# Altium PCB high-spped-thermocouple-logger_panel.PcbDoc (part 2 of 2)
Units mm, origin at the board's own origin, x right, y up, seen from the top; angles counter-clockwise.
Board outline 200.2 x 200.2 mm, 4 copper layers (Top Layer, GND Layer, VCC Layer, Bottom Layer), stack 1.55 mm thick; 2 components, 0 nets, 0 pads, 0 vias.
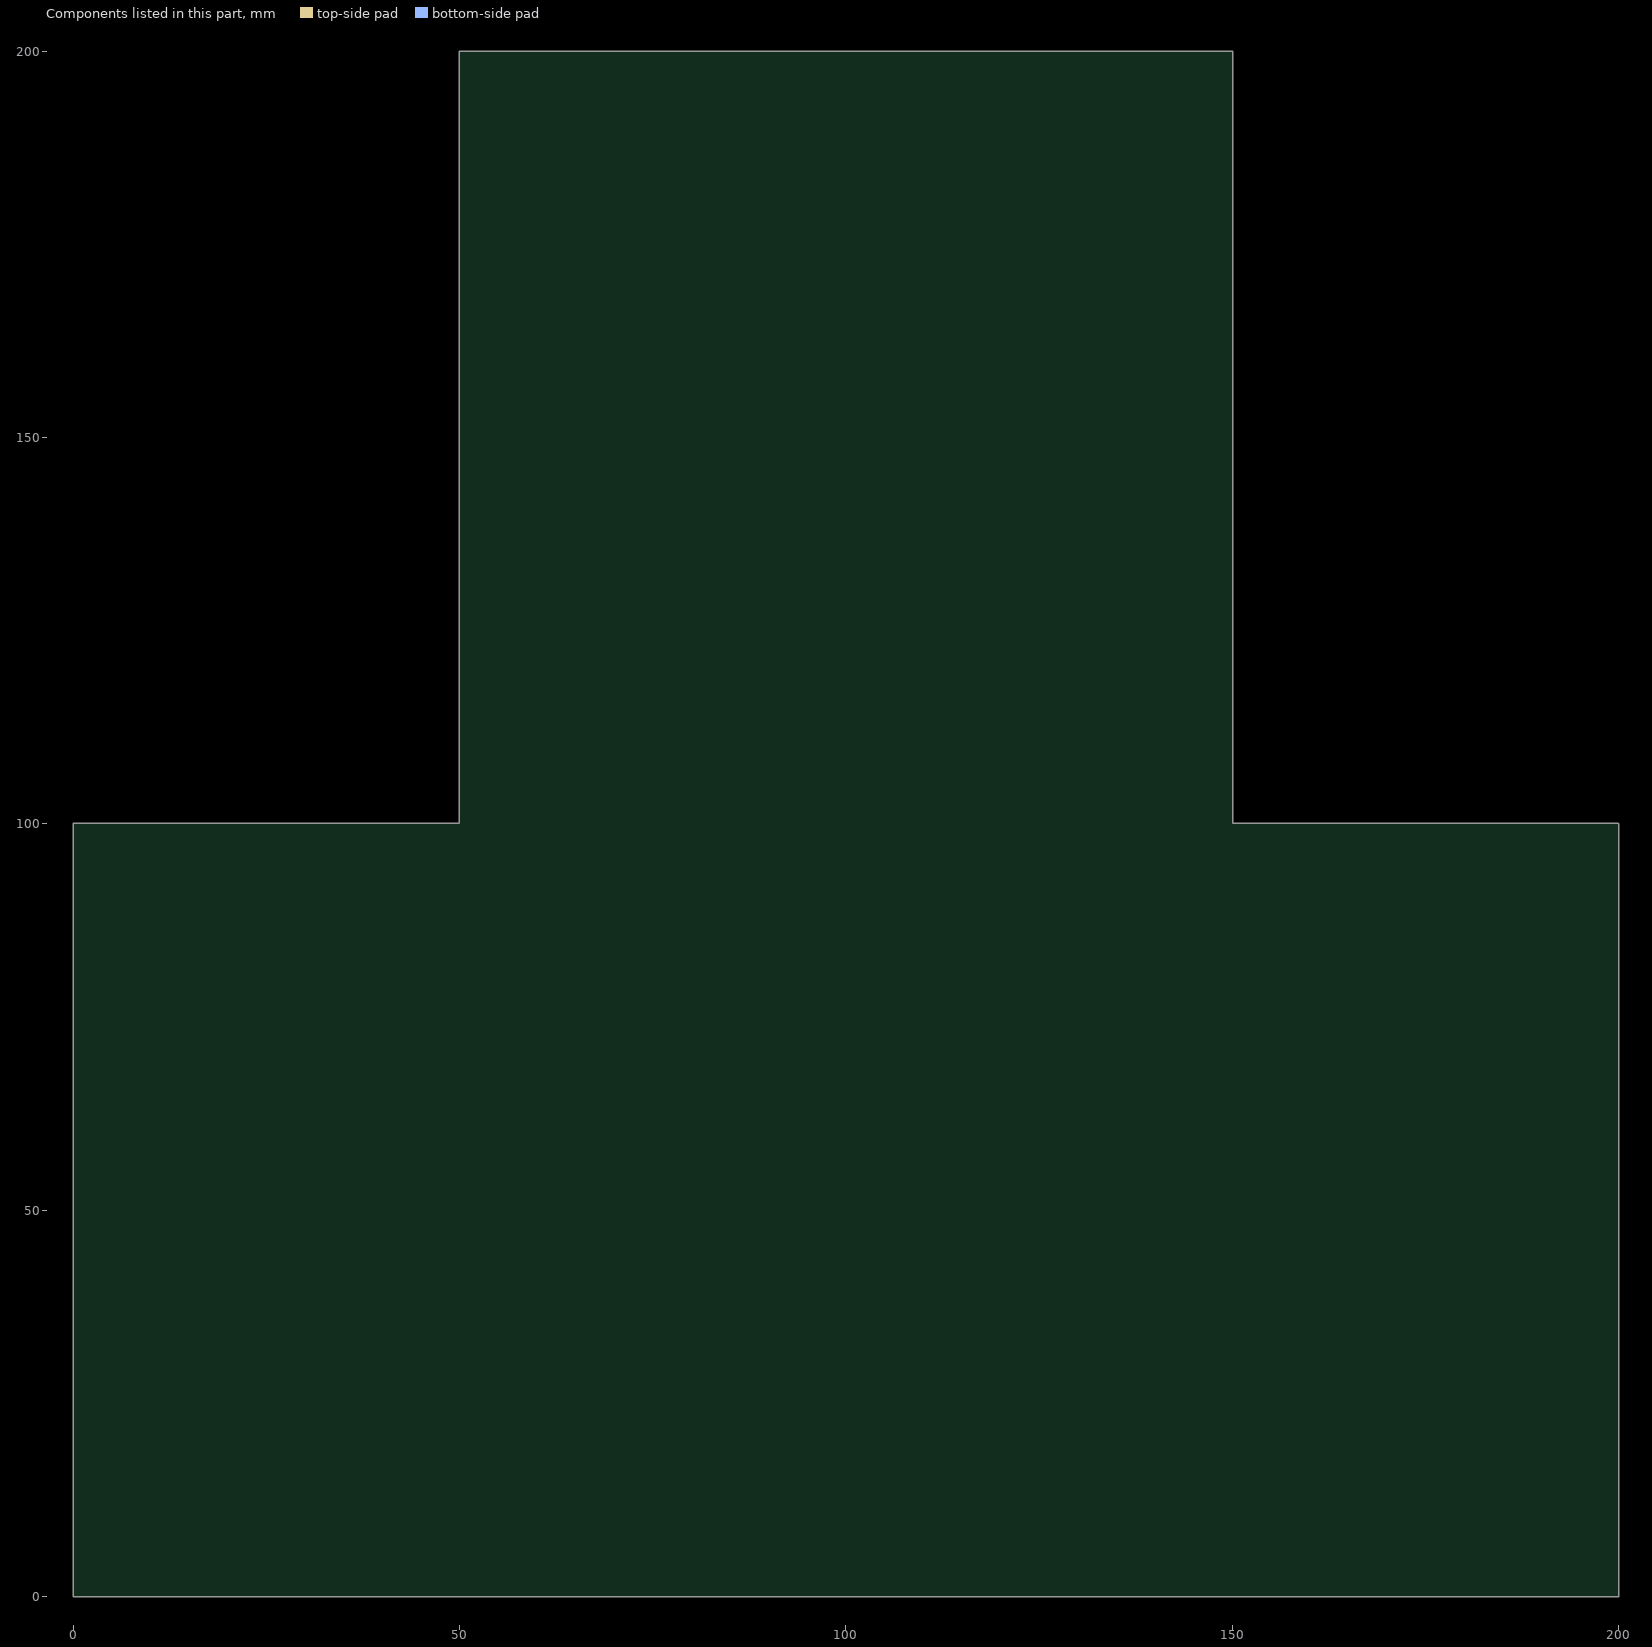
[diagram p4: the components of this part, seen from the top]

## Dimensions
200,100 to 200,0 on Courtyard Bot
150,200 to 150,100 on Courtyard Bot
0,100 to 50,100 on Courtyard Bot
0,-0.1 to 200,-0.1 on Courtyard Bot
0,0 to 50,200 on Courtyard Bot

## Panel: embedded boards
"high-spped-thermocouple-logger.PcbDoc" at 200,0, 1 rows x 1 columns, spacing 63.5 x 38.1, rotation 90

## Text inside footprints (layer, text, board x,y; h text height)
Designator4: PCB Info "*.GM2" at 108.6,-21.5 h3; Bottom Silkscreen "*.GBO" at 108.597,-21.569 h3; Top Layer "*.GTL" at 108.597,-21.569 h3; Comp Outl Top THT "*.GM9" at 108.597,-21.569 h3; Top Silkscreen "*.GTO" at 108.597,-21.569 h3; VCC Layer "*.G2" at 108.597,-21.569 h3; Stencil Engrv Top "*.GM23" at 108.597,-21.569 h3; Desg Top THT "*.GM11" at 108.597,-21.569 h3; Stencil Engrv Bot "*.GM24" at 108.597,-21.569 h3; Mfg Info "*.GM28" at 108.597,-21.569 h3; Mfg Info "Pripona/Extension:" at 69.597,-21.069 h2; Mfg Info "Vrstva/Layer:" at 5.097,-21.069 h2; Mfg Info "Cislo DPS/PCB number:" at 64.597,-26.569 h2; Mfg Info "Kontroloval/Checked by:" at 39.097,-31.069 h1; Mfg Info "Datum/Date:" at 39.097,-37.569 h1; Mfg Info "Kreslil/Drawn by:" at 39.097,-25.069 h1; Bottom Layer "*.GBL" at 108.597,-21.569 h3; Top Solder Mask "*.GTS" at 108.597,-21.569 h3; Bottom Solder Mask "*.GBS" at 108.597,-21.569 h3; Panel Outline "*.GM1" at 108.597,-21.569 h3; Route Tool Path "*.GM25" at 108.597,-21.569 h3; Dimension Top "*.GM26" at 108.597,-21.569 h3; Top Paste "*.GTP" at 108.597,-21.569 h3; Comp Outl Top SMD "*.GM3" at 108.597,-21.569 h3; Comp Outl Bot SMD "*.GM4" at 108.597,-21.569 h3; Desg Top SMD "*.GM5" at 108.597,-21.569 h3; Desg Bot SMD "*.GM6" at 108.597,-21.569 h3; Value Top SMD "*.GM7" at 108.597,-21.569 h3; Value Bot SMD "*.GM8" at 108.597,-21.569 h3; Comp Out Bot THT "*.GM10" at 108.597,-21.569 h3; GND Layer "*.G1" at 108.597,-21.569 h3; Desg Bot THT "*.GM12" at 108.597,-21.569 h3; Value Top THT "*.GM13" at 108.597,-21.569 h3; Value Bot THT "*.GM14" at 108.597,-21.569 h3; Courtyard Top "*.GM15" at 108.597,-21.569 h3; Courtyard Bot "*.GM16" at 108.597,-21.569 h3; 3D Models Top "*.GM17" at 108.597,-21.569 h3; 3D Models Bot "*.GM18" at 108.597,-21.569 h3; Aux. Silk Top SMD "*.GM19" at 108.597,-21.569 h3; Aux. Silk Bot SMD "*.GM20" at 108.597,-21.569 h3; Peelbl Mask Top "*.GM21" at 108.597,-21.569 h3; Peelbl Mask Bot "*.GM22" at 108.597,-21.569 h3; Dimension Bot "*.GM27" at 108.597,-21.569 h3; Bottom Paste "*.GBP" at 108.597,-21.569 h3; Keep-Out Layer "*.GKO" at 108.597,-21.569 h3
Designator5: PCB Info "Board edge" at -190.2,1.3 h2; PCB Info "85" at -183.5,-43 h1.5 r90; PCB Info "Free space" at -180.5,-50.5 h2 r90; PCB Info "PLACE THIS POINT AT CENTER OF LOWER PCB EDGE" at 104.5,-5.5 h2